# Altium PCB LKS_Motor_0313.PcbDoc
Units mm, origin at the board's own origin, x right, y up, seen from the top; angles counter-clockwise.
Board outline 109.77 x 15.02 mm, 2 copper layers (Top Layer, Bottom Layer); 91 components, 71 nets, 284 pads, 0 vias.
Unrouted connection lines stored in the file: 137.
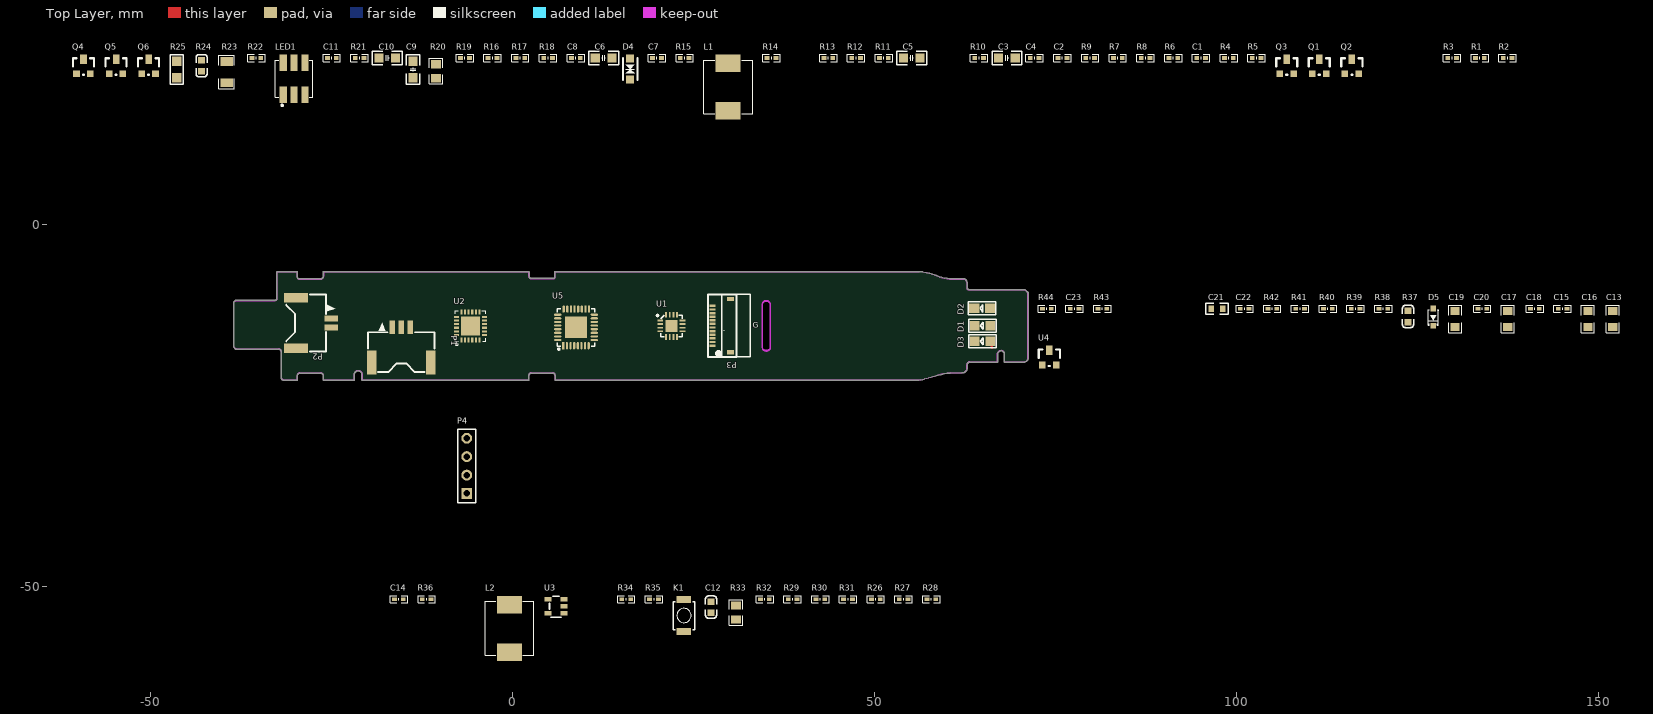
[diagram p0: Top Layer view]
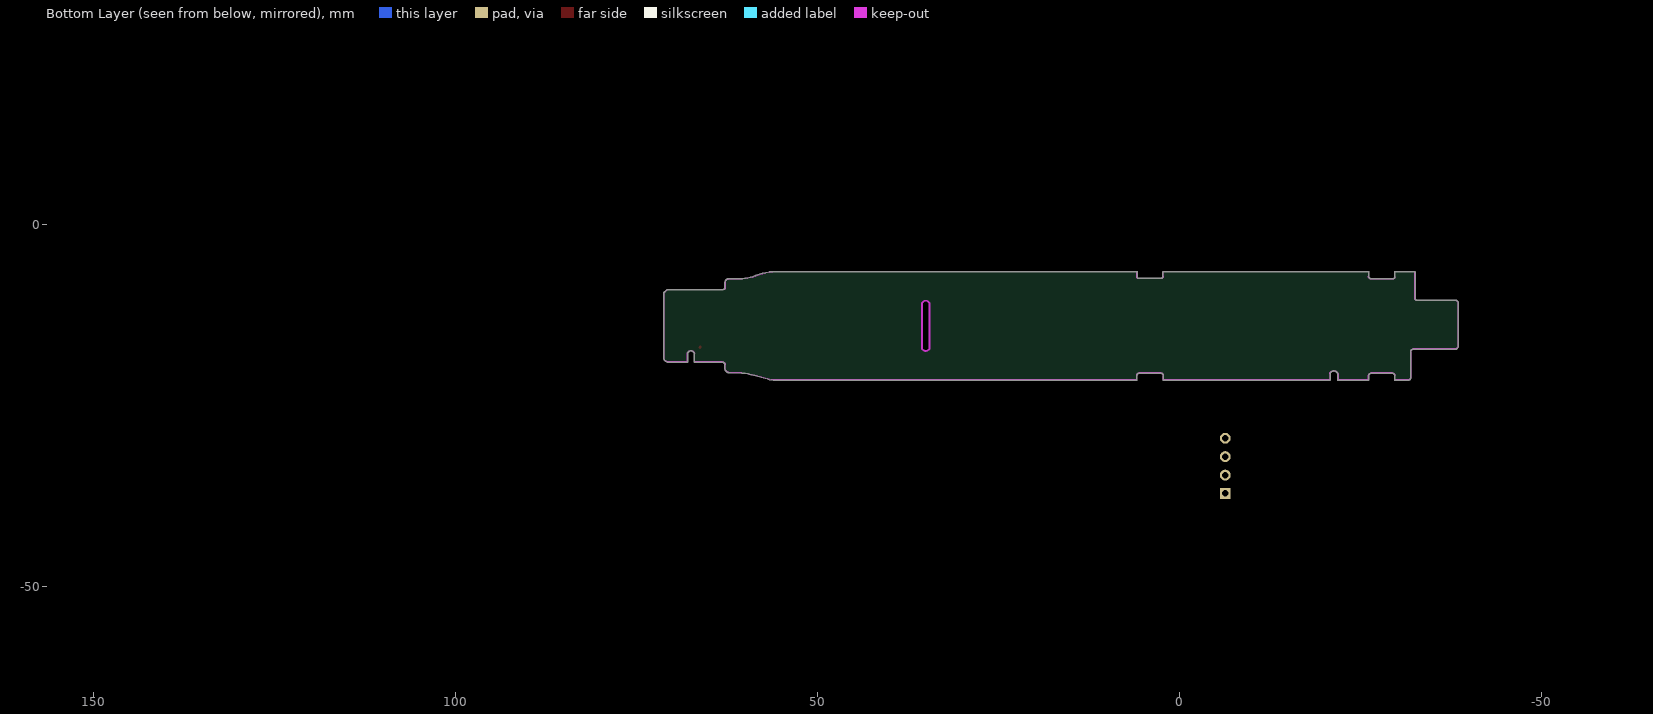
[diagram p1: Bottom Layer view, seen from below]

## Layer stack, top to bottom
Top Layer: signal copper 0.0356
Dielectric: core 0.32, FR-4, Dk 4.8
Bottom Layer: signal copper 0.0356

## Board outline
-29.774,-21.52 ccw(c-29.774,-21.469) -29.724,-21.469 -29.724,-20.88 cw(c-29.392,-20.88) -29.392,-20.549 -26.51,-20.549 cw(c-26.51,-20.927) -26.131,-20.927 -26.131,-21.469 ccw(c-26.08,-21.469) -26.08,-21.52 -21.921,-21.52 ccw(c-21.921,-21.469) -21.871,-21.469 -21.871,-20.602 cw(c-21.336,-20.789) -20.802,-20.602 -20.802,-21.469 ccw(c-20.752,-21.469) -20.752,-21.52 2.206,-21.52 ccw(c2.206,-21.469) 2.256,-21.469 2.256,-20.861 cw(c2.601,-20.862) 2.6,-20.517 5.535,-20.517 cw(c5.535,-20.845) 5.863,-20.845 5.863,-21.471 ccw(c5.913,-21.471) 5.913,-21.521 55.755,-21.521 ccw(c55.755,-21.471) 55.756,-21.521 ccw(c55.711,-17.4) 56.944,-21.333 58.763,-20.835 ccw(c58.75,-20.787) 58.765,-20.835 cw(c61.206,-29.028) 60.43,-20.514 62.028,-20.488 ccw(c62.112,-19.806) 62.79,-19.916 ccw(c62.74,-19.908) 62.79,-19.908 ccw(c62.74,-19.908) 62.79,-19.908 62.79,-19.363 cw(c63.153,-19.363) 63.153,-19.001 66.973,-19.001 ccw(c66.973,-18.951) 67.024,-18.951 67.024,-17.803 cw(c67.473,-17.907) 67.923,-17.803 67.923,-18.956 ccw(c67.973,-18.956) 67.973,-19.006 70.635,-19.006 ccw(c70.635,-18.956) 70.64,-19.006 ccw(c70.576,-18.337) 71.222,-18.524 ccw(c71.174,-18.51) 71.224,-18.51 71.224,-9.445 ccw(c71.174,-9.445) 71.209,-9.409 71.209,-9.41 70.79,-8.99 70.79,-8.991 ccw(c70.754,-9.026) 70.754,-8.976 63.028,-8.976 cw(c63.028,-8.712) 62.764,-8.712 62.764,-7.963 ccw(c62.303,-7.963) 62.303,-7.502 60.714,-7.502 cw(c60.902,-0.794) 58.932,-7.209 ccw(c55.348,-15.378) 56.188,-6.497 ccw(c56.184,-6.547) 56.184,-6.497 5.892,-6.497 ccw(c5.892,-6.547) 5.841,-6.547 5.841,-7.205 ccw(c5.892,-7.205) 5.841,-7.205 cw(c5.608,-7.205) 5.608,-7.438 cw(c5.608,-7.205) 5.608,-7.438 2.585,-7.438 cw(c2.585,-7.123) 2.27,-7.123 2.27,-6.55 ccw(c2.219,-6.55) 2.219,-6.499 -26.091,-6.499 ccw(c-26.091,-6.55) -26.141,-6.55 -26.141,-7.135 cw(c-26.497,-7.135) -26.497,-7.491 -29.472,-7.491 cw(c-29.472,-7.239) -29.724,-7.239 -29.724,-6.547 ccw(c-29.774,-6.547) -29.774,-6.497 -32.489,-6.497 ccw(c-32.489,-6.547) -32.539,-6.547 -32.539,-10.198 cw(c-32.796,-10.198) -32.796,-10.455 -38.231,-10.455 ccw(c-38.231,-10.505) -38.267,-10.47 -38.267,-10.469 -38.528,-10.73 -38.527,-10.73 ccw(c-38.492,-10.766) -38.542,-10.766 -38.542,-16.884 ccw(c-38.492,-16.884) -38.528,-16.92 -38.229,-17.219 ccw(c-38.193,-17.183) -38.193,-17.234 -32.284,-17.234 cw(c-32.284,-17.545) -31.973,-17.545 -31.973,-21.101 ccw(c-31.554,-21.101) -31.554,-21.52
cut-out: 34.506,-16.955 34.506,-11.03 cw(c35.044,-11.05) 35.581,-11.03 35.581,-17.03 cw(c35.047,-16.942)

## Design rules (kind name [scope] priority, off if disabled: settings)
Clearance Clearance_2 [(InPoly)] p1: gap=0.2
Clearance [All] p2: gap=0.127
ComponentClearance [All] p1 off: gap=0.254 collisioncheckmode=3 verticalgap=0.254 showdistances=FALSE
HoleSize [All] p1: absolutevalues=TRUE maxlimit=5.08 minlimit=0.025 maxpercent=80.000 minpercent=20.000
HoleToHoleClearance [All] p1: gap=0.127 allowstackedmicrovias=TRUE
MinimumSolderMaskSliver [All] p1 off: minsoldermaskwidth=0.127
PlaneClearance [All] p1: clearance=0.178
PolygonConnect PolygonConnect_1 [IsPad] p1: connectstyle=Relief reliefconductorwidth=0.508 reliefentries=4 polygonreliefangle="90 Angle"
PolygonConnect [All] p2: connectstyle=Direct reliefconductorwidth=0.508 reliefentries=4 polygonreliefangle="90 Angle"
RoutingVias [All] p1: holewidth=0.457 width=0.762 viastyle="Through Hole" minholewidth=0.3 minwidth=0.5 maxholewidth=1 maxwidth=2
SilkToSilkClearance [All] p1 off: silktosilkclearance=0.127
SilkscreenOverComponentPads [All] p1 off: minsilkscreentomaskgap=0.127
SolderMaskExpansion [All] p1: expansion=0.102
TestPointUsage FabricationTestPointUsage [All] p1: valid=0 allowmultiple=FALSE
Testpoint FabricationTestpoint [(IsPad And (OnTopLayer Or OnBottomLayer))] p1: side=3 testpointundercomponent=TRUE minsize=1.016 maxsize=2.54 preferedsize=1.524 minholesize=0 maxholesize=1.016 preferedholesize=0.813 testpointgrid=0.025 style=297 order=0123456789
Width [All] p1: maxlimit=2.54 minlimit=0.127 preferedwidth=0.203
17 further rules are at their usual default settings.

## Components (designator, comment, footprint, x,y, rotation, side; value= is the part's Value field where it differs from the comment)
C1 "104" "C 0402_M" 95.099,23.012 r0 top
C2 "104" "C 0402_M" 75.947,23.012 r0 top
C3 "22uF/16V" "C 0805_M" 68.276,23.012 r0 top
C4 "1uF/10V" "C 0402_M" 72.112,23.012 r0 top
C5 "22uF/16V" "C 0805_M" 55.119,23.012 r0 top
C6 "10uF/10V" "C 0805_M" 12.574,23.012 r0 top
C7 "104" "C 0402_M" 19.94,23.012 r0 top
C8 "104" "C 0402_M" 8.739,23.012 r0 top
C9 "22uF/16V" "C 0805_M" -13.74,21.412 r90 top
C10 "10uF/16V" "C 0805_M" -17.296,23.012 r0 top
C11 "3.3nF/16V" "C 0402_M" -24.967,23.012 r0 top
C12 "0.1UF" 0603_RON 27.408,-53.589 r90 top
C13 "22UF/25V" 0805C 151.944,-13.107 r90 top
C14 "100nF" "C 0402_M" -15.696,-51.76 r0 top
C15 "100PF/NC" "C 0402_M" 145.035,-11.634 r0 top
C16 "22UF/25V" 0805C 148.515,-13.107 r90 top
C17 "10UF/50V" 0805C 137.44,-13.107 r90 top
C18 "100nF" "C 0402_M" 141.2,-11.634 r0 top
C19 "10UF/50V" 0805C 130.176,-13.107 r90 top
C20 "100nF/50V" "C 0402_M" 133.935,-11.634 r0 top
C21 "10uF/10V" 0603 97.283,-11.634 r0 top
C22 "100nF/50V" "C 0402_M" 101.118,-11.634 r0 top
C23 "1nF/50V" "C 0402_M" 77.623,-11.634 r0 top
D1 "LED_R" SMDLED 64.894,-13.985 r180 top
D2 "LED_R" SMDLED 64.861,-11.572 r180 top
D3 "LED_R" SMDLED 64.894,-16.114 r180 top
D4 "SMF9.0V" SOD123F 16.359,21.513 r90 top
D5 "4148" SOD-323 127.153,-12.777 r90 top
K1 "K1" Button3x4x2 23.674,-53.996 r90 top
L1 "Inductor" 0630-10UH 29.77,18.999 r90 top
L2 "Inductor" 0630-10UH -0.431,-55.774 r90 top
LED1 "RGB5050" RGB-5050 -30.301,20.396 r90 top
P1 "Header 3" X9827WRS-3P -15.504,-16.619 r0 top
P2 "Header 2" X9827WRS-2P -27.49,-13.34 r270 top
P3 "Header 12" SMD-12 27.63,-11.227 r270 top
P4 "Header 4" HDR1X4 -6.327,-37.135 r90 top
Q1 "J3Y" SOT-23 110.466,20.802 r0 top
Q2 "J3Y" SOT-23 114.961,20.802 r0 top
Q3 "J3Y" SOT-23 105.97,20.802 r0 top
Q4 "J3Y" SOT-23 -60.222,20.802 r0 top
Q5 "J3Y" SOT-23 -55.727,20.802 r0 top
Q6 "J3Y" SOT-23 -51.231,20.802 r0 top
R1 "1K" "C 0402_M" 133.605,23.012 r0 top
R2 "1K" "C 0402_M" 137.44,23.012 r0 top
R3 "1K" "C 0402_M" 129.77,23.012 r0 top
R4 "10K" "C 0402_M" 98.934,23.012 r0 top
R5 "10K" "C 0402_M" 102.769,23.012 r0 top
R6 "10K" "C 0402_M" 91.263,23.012 r0 top
R7 "100K" "C 0402_M" 83.592,23.012 r0 top
R8 "100K" "C 0402_M" 87.428,23.012 r0 top
R9 "100K" "C 0402_M" 79.782,23.012 r0 top
R10 "NC" "C 0402_M" 64.441,23.012 r0 top
R11 "82K" "C 0402_M" 51.284,23.012 r0 top
R12 "10K" "C 0402_M" 47.448,23.012 r0 top
R13 "1K" "C 0402_M" 43.613,23.012 r0 top
R14 "15K" "C 0402_M" 35.764,23.012 r0 top
R15 "120K" "C 0402_M" 23.775,23.012 r0 top
R16 "1K" "C 0402_M" -2.768,23.012 r0 top
R17 "1K" "C 0402_M" 1.068,23.012 r0 top
R18 "1K" "C 0402_M" 4.903,23.012 r0 top
R19 "180K" "C 0402_M" -6.578,23.012 r0 top
R20 "2R/0805" 0805R -10.591,21.183 r90 top
R21 "1K1%" "C 0402_M" -21.132,23.012 r0 top
R22 "1K1%" "C 0402_M" -35.381,23.012 r0 top
R23 "0.5/1206" 1206R -39.369,21.183 r90 top
R24 "51K" 0603_RON -42.95,21.183 r90 top
R25 "0.100R/0805" "R 0805_M" -46.379,21.412 r90 top
R26 "10K" "C 0402_M" 50.166,-51.76 r0 top
R27 "10K" "C 0402_M" 54.001,-51.76 r0 top
R28 "10K" "C 0402_M" 57.837,-51.76 r0 top
R29 "100K" "C 0402_M" 38.685,-51.76 r0 top
R30 "100K" "C 0402_M" 42.521,-51.76 r0 top
R31 "100K" "C 0402_M" 46.331,-51.76 r0 top
R32 "1.5M/NC" "C 0402_M" 34.85,-51.76 r0 top
R33 "0R/0805/NC" 0805R 30.862,-53.589 r90 top
R34 "200K" "C 0402_M" 15.698,-51.76 r0 top
R35 "100K" "C 0402_M" 19.534,-51.76 r0 top
R36 "3.3M" "C 0402_M" -11.861,-51.76 r0 top
R37 "680K" 0603_RON 123.674,-13.462 r90 top
R38 "10K" "C 0402_M" 120.27,-11.634 r0 top
R39 "100K" "C 0402_M" 116.435,-11.634 r0 top
R40 "200K" "C 0402_M" 112.599,-11.634 r0 top
R41 "1K" "C 0402_M" 108.764,-11.634 r0 top
R42 "47K" "C 0402_M" 104.928,-11.634 r0 top
R43 "1K1%" "C 0402_M" 81.459,-11.634 r0 top
R44 "10R" "C 0402_M" 73.788,-11.634 r0 top
U1 "MS39233" QFN16 21.958,-14 r0 top
U2 "ip2326" QFN24 -5.697,-14.003 r0 top
U3 "CS5515R" SOT23-5 5.741,-52.853 r0 top
U4 "CJ6376A33MY" SOT-23 73.178,-19.406 r0 top
U5 "LKS32MC072KBQ8" "QFN32 5x5_M" 8.76,-14.204 r0 top

## Footprints (in the part's own frame and the unit in brackets; to place one, negate y for a bottom-side part, rotate by r counter-clockwise, add the part's x,y. Pads: shape width x height; smd on the part's side, far side on the other; paste and mask are expansions set on the pad)
0603 [mm]
  rect 0.8x0.955 smd: 1(-0.795,0) 2(0.795,0)
  silkscreen extent -1.53,-0.75 1.56,0.75
0603_RON [mm]
  rect 0.9x0.95 smd: 1(0,0) 2(1.524,0)
  silkscreen extent -0.76,-0.76 2.29,0.76
0630-10UH [mm]
  rect 2.424x3.42 smd: 1(3.278,0) 2(-3.278,0)
  silkscreen extent -3.73,-3.38 3.73,3.38
0805C [mm]
  rect 1.1x1.27 smd: 1(-1.016,0) 2(1.159,0)
  silkscreen extent -1.83,-0.89 1.98,0.89
0805R [mm]
  rect 1.133x1.377 smd: 1(-0.966,0) 2(0.966,0)
  silkscreen extent -1.76,-0.92 1.76,0.92
1206R [mil]
  rect 47.54x66.97 smd: 1(-63.22,5) 2(53.22,5)
  silkscreen extent -96,-37 86,47
Button3x4x2 [mm]
  rect 1x2 smd: 1(-2.2,0) 2(2.2,0)
  silkscreen extent -2,-1.5 1.9,1.5
"C 0402_M" [mil] "无极性贴片电容"
  rect 26x20 smd: 1(-24,0) 2(24,0)
  silkscreen extent -47,-20 47,20, body extent -20,-10 20,10, height 21
"C 0805_M" [mil] "无极性贴片电容"
  rect 50x50 smd: 1(-45,0) 2(45,0)
  silkscreen extent -81,-36 81,36, body extent -39,-24 39,24, height 20
HDR1X4 [mm] "Connector; Header; 4 Position"
  rect 1.5x1.5 hole 0.9: 1(0,0)
  round 1.5 hole 0.9: 2(2.54,0) 3(5.08,0) 4(7.62,0)
  silkscreen extent -1.27,-1.27 8.89,1.27
QFN16 [mm] "3mm*3mm"
  rect 0.8x0.25 smd: 1(-1.575,0.75) 2(-1.575,0.25) 3(-1.575,-0.25) 4(-1.575,-0.75) 9(1.524,-0.75) 10(1.524,-0.25) 11(1.524,0.25) 12(1.524,0.75)
  rect 0.25x0.8 smd: 5(-0.75,-1.55) 6(-0.25,-1.55) 7(0.25,-1.55) 8(0.75,-1.55) 13(0.75,1.55) 14(0.25,1.55) 15(-0.25,1.55) 16(-0.75,1.55)
  rect 1.7x1.7 smd: 17(0,0)
  silkscreen extent -2.07,-1.5 1.5,1.56, body extent -1.55,-1.52 1.49,1.52, height 0.9
QFN24 [mm]
  rect 0.3x0.7 smd: 1(-1.377,-1.942) 2(-0.877,-1.942) 3(-0.377,-1.942) 4(0.123,-1.942) 5(0.623,-1.942) 6(1.123,-1.942) 13(1.123,1.942) 14(0.623,1.942) 15(0.123,1.942) 16(-0.377,1.942) 17(-0.877,1.942) 18(-1.377,1.942)
  rect 0.7x0.3 smd: 7(1.821,-1.25) 8(1.821,-0.75) 9(1.821,-0.25) 10(1.821,0.25) 11(1.821,0.75) 12(1.821,1.25) 19(-2.075,1.25) 20(-2.075,0.75) 21(-2.075,0.25) 22(-2.075,-0.25) 23(-2.075,-0.75) 24(-2.075,-1.25)
  rect 2.6x2.6 smd: 25(-0.126,-0.001)
  silkscreen extent -2.23,-2.67 1.97,2.1
"QFN32 5x5_M" [mm] "32脚，长x宽x高：5x5x0.95mm，脚距：0.5mm"
  rect 3x3 smd: 0(0,0)
  rect 0.3x1 smd: 1(-1.751,-2.528)
  oval 0.3x1 smd: 2(-1.25,-2.528) 3(-0.75,-2.528) 4(-0.25,-2.528) 5(0.25,-2.528) 6(0.75,-2.528) 7(1.25,-2.528) 8(1.75,-2.528) 17(1.8,2.528) 18(1.3,2.528) 19(0.8,2.528) 20(0.3,2.528) 21(-0.2,2.528) 22(-0.7,2.528) 23(-1.2,2.528) 24(-1.7,2.528)
  oval 1x0.3 smd: 9(2.528,-1.75) 10(2.528,-1.25) 11(2.528,-0.75) 12(2.528,-0.25) 13(2.528,0.25) 14(2.528,0.75) 15(2.528,1.25) 16(2.528,1.75) 25(-2.528,1.75) 26(-2.528,1.25) 27(-2.528,0.75) 28(-2.528,0.25) 29(-2.528,-0.25) 30(-2.528,-0.75) 31(-2.528,-1.25) 32(-2.528,-1.75)
  silkscreen extent -2.6,-3.12 2.6,2.6
"R 0805_M" [mil] "1/8W贴片电阻"
  rect 50x50 smd: 1(-45,0) 2(45,0)
  silkscreen extent -81,-36 81,36, body extent -39,-25 39,25, height 20
RGB-5050 [mm]
  rect 2.265x1 smd: 1(-2.462,1.373) 2(-2.462,-0.127) 3(-2.462,-1.627) 4(1.954,-1.627) 5(1.954,-0.127) 6(1.954,1.373)
  silkscreen extent -4.06,-2.7 2.32,2.45
SMD-12 [mil]
  rect 22x36 smd: 0(252.38,97.5) 0/2(-37.62,97.5)
  rect 13x32 smd: 1(216.53,0) 2(196.85,0) 3(177.17,0) 4(157.48,0) 5(137.79,0) 6(118.11,0) 7(98.42,0) 8(78.74,0) 9(59.05,0) 10(39.37,0) 11(19.69,0) 12(0,0)
  silkscreen extent -62,-25 279,130
SMDLED [mm]
  rect 1.4x1.27 smd: 1(-1.105,0) 2(1.105,0)
  silkscreen extent -1.91,-0.89 1.91,0.89
SOD123F [mm]
  rect 1.1x1.1 smd: 1(-1.482,0.121) 2(1.419,0.121)
  silkscreen extent -1.53,-0.88 1.47,1.12
SOD-323 [mm]
  rect 0.8x0.8 smd: 1(1.2,0) 2(-1.2,0)
  silkscreen extent -1.1,-0.7 1,0.7
SOT23-5 [mm]
  rect 1x0.6 smd: 1(1.354,-0.823) 2(1.354,0.127) 3(1.354,1.077) 4(-0.846,1.077) 5(-0.846,-0.823)
  silkscreen extent -0.64,-1.4 0.95,1.52
SOT-23 [mil]
  rect 36x36 smd: 1(0,0) 2(75,0)
  rect 36x50 smd: 3(38,80)
  silkscreen extent -20,-5 95,85
X9827WRS-2P [mm]
  rect 0.8x1.9 smd: 1(-0.371,2.438) 2(0.879,2.438)
  rect 1.3x3.35 smd: 3(3.729,-2.438) 4(-3.221,-2.438)
  silkscreen extent -3.7,-3.76 4.2,3.02
X9827WRS-3P [mm]
  rect 0.8x1.9 smd: 1(-1.123,2.438) 2(0.127,2.438) 3(1.377,2.438)
  rect 1.3x3.35 smd: 4(4.227,-2.438) 5(-3.973,-2.438)
  silkscreen extent -4.45,-3.76 4.7,3.04

## Part data
C1 C2 C3 C4 C5 C6 C7 C8 C9 C10 C11 C21 C22 C23: library part C, "Capacitor"
C12 C13 C16 C17 C19 C20: library part CAP, "Capacitor"
C14 C15 C18: library part CAP
D1 D2 D3: library part LED
D5: library part Diode, "Default Diode"
P1: "Header, 3-Pin"
P2: "Header, 2-Pin"
P3: "Header, 12-Pin"
P4: "Header, 4-Pin"
Q1 Q2 Q3 Q4 Q5 Q6: library part NPN, "NPN Transistor"
R1 R2 R3 R4 R5 R6 R7 R8 R9 R10 R11 R12 R13 R14 R15 R16 R17 R18 R19 R20 R23 R24 R26 R27 R28 R29 R30 R31 R32 R33 R34 R35 R36 R37 R38 R39 R40 R41 R42: library part RES2_S
R21 R22 R43 R44: library part Res, "Resistor"
R25: library part RES2短
U4: library part 78L15
U5: library part LKS32MC072KBQ82, "LKS32MC072KBQ8 / 凌鸥创芯，128KFlash，12KRAM"

## Nets (pads, with @x,y where several pads share a name; then routed paths per layer and width w, separated by ;. In a path a pad name is that pad's centre, name@x,y a point inside that pad or via, vN(x,y) a via of type N, cw(c..) or ccw(c..) an arc to the next point about the centre after c; other vN are vias at no path point)
1ST: R6.2 U5.5
2ND: R4.2 U5.6
3.3V: C4.2 C17.2 C18.1 C21.2 P3.12 R1.2 R2.2 R3.2 R16.2 R17.2 R18.2 R33.2 U1.16 U4.1 U5.3
3RD: R5.2 U5.7
5.0V: C15.1 C16.2 C19.2 L2.2 P4.1 R36.1 U4.2
5VVIN: C6.1 C7.2 D4.2 L1.2 P2.1 R23.1 R24.1
8.4V: C9.2 C13.2 C14.1 P1.3 R32.1 R34.2 R40.1 U1.3 U2.21 U2.22 U3.4
A_N: U1.13 U5.23
A_P: U1.12 U5.22
B_N: U1.15 U5.21
B_P: U1.14 U5.20
BAT_ADC: R41.1 U5.12
BLUE: R28.2 U5.10
C_N: U1.1 U5.19
C_P: U1.2 U5.18
CH: R12.2 R14.1 U5.30
EN: U5.27
FAULT: U1.11 U5.24
GND: C1.2 C2.2 C3.1 C4.1 C5.1 C6.2 C7.1 C9.1 C10.2 C11.2 C12.2 C13.1 C14.2 C16.1 C17.1 C18.2 C19.1 C20.2 C21.1 C22.2 C23.1 D4.1 P1.1 P2.2 P3.7 P4.2 Q1.2 Q2.2 Q3.2 Q4.2 Q5.2 Q6.2 R7.2 R8.2 R9.2 R10.2 R11.2 R13.2 R14.2 R15.2 R19.2 R22.1 R25.2 R29.2 R30.2 R31.2 R35.1 R37.2 R39.1 R42.2 R44.2 U1.10 U1.17 U2.18 U2.25 U3.2 U4.3 U5.0
GREEN: R26.2 U5.9
LH_OUT_0: P3.8 P3.10 U5.17
LH_OUT_1: P3.9 P3.11 U5.1
NetC3_2: C3.2 C5.2 U2.19 U2.20
NetC8_1: C8.1 U2.14
NetC8_2: C8.2 L1.1 R20.1 U2.15 U2.16 U2.17
NetC10_1: C10.1 R23.2 U2.13
NetC11_1: C11.1 R20.2
NetC15_2: C15.2 R36.2 R37.1 U3.5
NetC20_1: C20.1 R33.1
NetD1_1: D1.1 R1.1
NetD1_2: D1.2 Q1.3
NetD2_1: D2.1 R2.1
NetD2_2: D2.2 Q2.3
NetD3_1: D3.1 R3.1
NetD3_2: D3.2 Q3.3
NetD5_1: D5.1 R38.1
NetD5_2: D5.2 R32.2 R39.2 U3.1
NetK1_1: K1.1 R34.1
NetL2_1: L2.1 U3.3
NetLED1_1: LED1.1 R18.1
NetLED1_2: LED1.2 R17.1
NetLED1_3: LED1.3 R16.1
NetLED1_4: LED1.4 Q4.3
NetLED1_5: LED1.5 Q5.3
NetLED1_6: LED1.6 Q6.3
NetQ1_1: Q1.1 R4.1 R7.1
NetQ2_1: Q2.1 R5.1 R8.1
NetQ3_1: Q3.1 R6.1 R9.1
NetQ4_1: Q4.1 R26.1 R29.1
NetQ5_1: Q5.1 R27.1 R30.1
NetQ6_1: Q6.1 R28.1 R31.1
NetR10_1: R10.1 U2.3
NetR12_1: R12.1 U2.6
NetR13_1: R13.1 U2.7
NetR15_1: R15.1 U2.8
NetR19_1: R19.1 U2.11
NetR24_2: R24.2 U2.12
NetR40_2: R40.2 R41.2 R42.1
NRST: C22.1 U5.2
NTC: C1.1 C2.1 P1.2 R11.1 U2.4
OC: C23.2 R43.1 U5.11
OPA3_IN: R22.2 U5.16
OPA3_IP: R21.2 U5.15
PGND: R21.1 R25.1 R43.2 R44.1 U1.5 U1.6 U1.8
RED: R27.2 U5.8
START_KEY: C12.1 K1.2 R35.2 R38.2 U5.29
SWCLK: P4.4 U5.31
SWDIO: P4.3 U5.32
U: P3.1 P3.2 U1.9
V: P3.3 P3.4 U1.7
W: P3.5 P3.6 U1.4
pads on no net: P1.4 P1.5 P2.3 P2.4 P3.0 P3.0/2 U2.1 U2.2 U2.5 U2.9 U2.10 U2.23 U2.24 U5.4 U5.13 U5.14 U5.25 U5.26 U5.28
copper on no net: | length 0.1
  Top Layer w0.4: 66.181,-16.93 66.231,-16.98 66.181,-16.93

## Keep-outs
Keep-Out Layer:
  lines w0.025: 34.506,-16.955 ccw(c35.047,-16.942) 35.581,-17.03 ; 34.506,-11.03 cw(c35.044,-11.05) 35.581,-11.03
  lines w0.076: 34.551,-17.194 34.551,-10.886 ; 35.589,-17.194 35.589,-10.886
  lines w0.1: 58.914,-7.256 ccw(c60.902,-0.794) 60.713,-7.552 62.303,-7.552 cw(c62.303,-7.963) 62.714,-7.963 62.714,-8.712 ccw(c63.028,-8.712) 63.028,-9.026 70.754,-9.026 71.174,-9.445 71.174,-18.51 cw(c70.576,-18.337) 70.635,-18.956 67.973,-18.956 67.973,-17.797 ccw(c67.473,-17.907) 66.973,-17.797 66.973,-18.951 63.153,-18.951 ccw(c63.153,-19.363) 62.74,-19.363 62.74,-19.908 cw(c62.112,-19.806) 62.031,-20.438 60.428,-20.464 ccw(c61.206,-29.028) 58.75,-20.787 56.93,-21.284 cw(c55.711,-17.4) 55.755,-21.471 5.913,-21.471 5.913,-20.845 ccw(c5.535,-20.845) 5.535,-20.467 2.6,-20.467 ccw(c2.601,-20.862) 2.206,-20.861 2.206,-21.469 -20.752,-21.469 -20.752,-20.594 ccw(c-21.336,-20.789) -21.921,-20.594 -21.921,-21.469 -26.08,-21.469 -26.08,-20.927 ccw(c-26.51,-20.927) -26.51,-20.498 -29.392,-20.498 ccw(c-29.392,-20.88) -29.774,-20.88 -29.774,-21.469 -31.554,-21.469 cw(c-31.554,-21.101) -31.922,-21.101 -31.922,-17.545 ccw(c-32.284,-17.545) -32.284,-17.183 -38.193,-17.183 -38.492,-16.884 -38.492,-10.766 -38.231,-10.505 -32.796,-10.505 ccw(c-32.796,-10.198) -32.489,-10.198 -32.489,-6.547 -29.774,-6.547 -29.774,-7.239 ccw(c-29.472,-7.239) -29.472,-7.542 -26.497,-7.542 ccw(c-26.497,-7.135) -26.091,-7.135 -26.091,-6.55 2.219,-6.55 2.219,-7.123 ccw(c2.585,-7.123) 2.585,-7.489 5.608,-7.489 ccw(c5.608,-7.205) 5.892,-7.205 5.892,-6.547 56.184,-6.547 cw(c55.348,-15.378) 58.914,-7.256 ; 58.914,-7.256 58.914,-7.256
Multi-Layer:
  region: 35.527,-10.864 ccw(c35.561,-10.845) 35.594,-10.827 ccw(c35.042,-11.13) 34.49,-10.827 ccw(c34.523,-10.845) 34.557,-10.864 cw(c35.042,-11.13)
  region: 34.485,-17.153 ccw(c34.523,-17.153) 34.562,-17.153 34.562,-10.845 ccw(c34.523,-10.845) 34.485,-10.845
  region: 34.555,-17.132 ccw(c34.523,-17.153) 34.491,-17.174 ccw(c35.042,-16.815) 35.592,-17.174 ccw(c35.561,-17.153) 35.529,-17.132 cw(c35.042,-16.815)
  region: 35.522,-17.153 ccw(c35.561,-17.153) 35.599,-17.153 35.599,-10.845 ccw(c35.561,-10.845) 35.522,-10.845

## Silkscreen, mask and mechanical layers (free items; w line width, h text height)
Top Overlay:
  circle w0.762: c28.427,-17.799 r0.074
  lines w0.05: 29.211,-14.65 29.241,-14.63
  lines w0.2: 28.883,-18.261 32.809,-18.261 32.809,-9.594 28.883,-9.594 28.883,-18.261
  text "G" at 33.161,-14.54 h1.3
Mechanical 1:
  lines w0.025: 34.506,-16.955 34.506,-11.03 ; 35.581,-17.03 35.581,-11.03
Mechanical 15:
  lines w0.076: 38.086,-15.511 ccw(c38.721,-15.511) 38.721,-16.146 44.976,-16.146 ccw(c44.875,-15.696) 44.976,-15.246 38.859,-15.246 38.859,-12.728 44.981,-12.728 ccw(c44.895,-12.287) 44.923,-11.839 38.736,-11.839 ccw(c38.736,-12.489) 38.086,-12.489 38.086,-15.511 ; 51.082,-15.5 ccw(c51.717,-15.5) 51.717,-16.135 57.972,-16.135 ccw(c57.871,-15.686) 57.972,-15.236 51.855,-15.236 51.855,-12.717 57.978,-12.717 ccw(c57.891,-12.276) 57.919,-11.828 51.732,-11.828 ccw(c51.732,-12.478) 51.082,-12.478 51.082,-15.5
  lines w0.1: 66.167,-21.819 66.243,-21.742 66.243,-7.264